# EAGLE board Filter + Rectifier + ADC (EAGLE 9.6.2)

Size 160 x 100 mm. Coordinates in mm from the lower left corner, seen from the top.
Outline: 0,0 160,0 160,100 0,100 0,0
Copper layers (1*16): Top 0.035mm / dielectric 1.5mm / Bottom 0.035mm
Design rules "default": minimum track width 6mil, minimum drill 0.35mm, track to track 6mil, track to pad 6mil, pad to pad 6mil, via to via 6mil, smd to smd 6mil, copper to edge 40mil, drill to drill 6mil, minimum pad ring 10mil, minimum via ring 8mil, stop-mask expansion 4mil, vias tented up to drill 0mil, thermal gap 10mil

## Footprints (pad centres in the part's own frame; a part is rotated, then mirrored left to right if it is on the bottom)
YC7B5 = drill 1.118 octagon: 1 -3.81,0; 2 3.81,0
DO41-10 = drill 1.118: A 5.08,0; C -5.08,0
JP2W = drill 0.914 long: 1 -2.54,-1.27; 2 0,-1.27; 3 2.54,-1.27
0204/7 = drill 0.813 octagon: 1 -3.81,0; 2 3.81,0
0207/2V = drill 0.813 octagon: 1 -1.27,0; 2 1.27,0
PDIP14_646-06_ONS = drill 0.813 pad 1.321 square: 1 0,0 | drill 0.813 pad 1.321: 2 0,-2.54; 3 0,-5.08; 4 0,-7.62; 5 0,-10.16; 6 0,-12.7; 7 0,-15.24; 8 7.62,-15.24; 9 7.62,-12.7; 10 7.62,-10.16; 11 7.62,-7.62; 12 7.62,-5.08; 13 7.62,-2.54; 14 7.62,0
DIP794W45P254L1969H508Q14 = drill 0.77 pad 1.17 square: 1 -3.97,7.62 | drill 0.77 pad 1.17: 2 -3.97,5.08; 3 -3.97,2.54; 4 -3.97,0; 5 -3.97,-2.54; 6 -3.97,-5.08; 7 -3.97,-7.62; 8 3.97,-7.62; 9 3.97,-5.08; 10 3.97,-2.54; 11 3.97,0; 12 3.97,2.54; 13 3.97,5.08; 14 3.97,7.62

## Placement (x,y rotation side)
CY1  [YC7B5]  38.1,63.5 0 top
CY2  [YC7B5]  38.1,52.07 0 top
CY3  [YC7B5]  63.5,29.21 0 top
D1  1N4004  [DO41-10]  36.83,39.37 90 top
MIC  [JP2W]  2.54,50.8 90 top
R1  [0204/7]  24.13,63.5 0 top
R2  [0204/7]  25.4,52.07 0 top
R3  [0204/7]  55.88,48.26 270 top
R4  [0204/7]  82.55,48.26 0 top
R5  [0204/7]  81.28,38.1 270 top
R6  [0204/7]  90.17,31.75 270 top
R7  [0204/7]  25.4,34.29 0 top
R8  [0204/7]  54.61,26.67 0 top
R9  [0207/2V]  41.91,26.67 0 top
R10  [0207/2V]  12.7,27.94 270 top
R11  [0207/2V]  12.7,83.82 180 top
R12  [0207/2V]  72.39,6.35 90 top
R19  [0204/7]  62.23,17.78 90 top
R20  [0204/7]  54.61,21.59 357.4 top
U1  LM339AN  [PDIP14_646-06_ONS]  52.07,10.16 270 top
U2  TL084CN  [DIP794W45P254L1969H508Q14]  105.41,45.72 0 top

## Library data of the parts
CY1-CY3 = rcl; SPICEPREFIX: C
D1 = diode
MIC = jumper
R1-R12 R19 R20 = rcl; SPICEPREFIX: R
U1 = LM339AN; COPYRIGHT: Copyright (C) 2022 Ultra Librarian. All rights reserved.; DIGI-KEY_PART_NUMBER_1: 2156-LM339AN-HC-ND; DIGI-KEY_PART_NUMBER_2: 2156-LM339AN-ON-ND; DIGI-KEY_PART_NUMBER_3: 296-6605-5-ND; DIGI-KEY_PART_NUMBER_4: 497-1587-5-ND; DIGI-KEY_PART_NUMBER_5: LM339ANFS-ND; MANUFACTURER_PART_NUMBER: LM339AN; MFR_NAME: onsemi
U2 = TL084CN; DESCRIPTION: Quad High Slew Rate JFET-Input Operational Amplifier 14-PDIP 0 to 70; DIGI-KEY_PART_NUMBER: 296-1784-5-ND; MF: Texas Instruments; MP: TL084CN; PACKAGE: PDIP-14 Texas Instruments; PURCHASE-URL: https://pricing.snapeda.com/search/part/TL084CN/?ref=eda

## Nets
+3V3: R8.2 R12.2 R19.2 R20.2
+5V: MIC.3 U1.3
GND: CY3.2 MIC.2 R2.1 R4.1 R7.1 R11.1 U1.12 U2.5
N$8: CY2.2 R3.2 R5.1 U2.1
N$9: D1.A R6.2 U2.7
N$10: MIC.1 R1.1
N$11: CY1.1 CY2.1 R1.2 R2.2
N$12: CY1.2 R3.1 U2.2
N$13: R4.2 U2.3
N$15: CY3.1 D1.C R7.2 U1.5 U1.7 U1.9
N$16: R5.2 R6.1 U2.6
N$17: R8.1 R9.2 U1.4
N$18: R9.1 R10.2 U1.6
N$19: R10.1 R11.2 U1.8
N$20: R20.1 U1.2
N$21: R19.1 U1.1
N$22: R12.1 U1.14
VCC/2: U2.4 U2.11

## Tracks (layer width: path | path; a pad name or v marks a point on that pad's centre or on a via)
+3V3  (3 unrouted)
+5V  (1 unrouted)
GND  (7 unrouted)
N$8  (3 unrouted)
N$9  (2 unrouted)
N$10  (1 unrouted)
N$11  (3 unrouted)
N$12  (2 unrouted)
N$13  (1 unrouted)
N$15  (5 unrouted)
N$16  (2 unrouted)
N$17  (2 unrouted)
N$18  (2 unrouted)
N$19  (2 unrouted)
N$20  (1 unrouted)
N$21  (1 unrouted)
N$22  (1 unrouted)
VCC/2  (1 unrouted)